# EAGLE board CT_schematic (EAGLE 7.6.0)

Size 100 x 80 mm. Coordinates in mm from the lower left corner, seen from the top.
Outline: 0,0 100,0 100,80 0,80 0,0
Copper layers (1*16): Top 0.035mm / dielectric 1.5mm / Bottom 0.035mm
Design rules "default": minimum track width 10mil, minimum drill 24mil, track to track 8mil, track to pad 8mil, pad to pad 8mil, via to via 8mil, smd to smd 8mil, copper to edge 40mil, drill to drill 8mil, minimum pad ring 10mil, minimum via ring 8mil, stop-mask expansion 4mil, vias tented up to drill 0mil, thermal gap 10mil

## Footprints (pad centres in the part's own frame; a part is rotated, then mirrored left to right if it is on the bottom)
C0603 = smd 0.8 x 0.8: 1 -0.762,0; 2 0.762,0
C0402 = smd 0.5 x 0.5: 1 -0.508,0; 2 0.508,0
C1210 = smd 1.2 x 2.5: 1 -1.524,0; 2 1.524,0
R0603 = smd 0.8 x 0.8: 1 -0.762,0; 2 0.762,0
EXV-9H = smd 3.505 x 1.676: 1 -2.857,0; 2 2.857,0
L0603 = smd 0.8 x 0.8: 1 -0.762,0; 2 0.762,0
IND25X25CZ = smd 2.489 x 3.429: 1 -2.718,0; 2 2.718,0
PJ-037B_PACKAGE = drill 3.7 square: 1 12,0 | drill 3.2 square: 2 6,0
WLCSP100 = smd 0.229 x 0.229: A1 -1.8,1.8; A2 -1.4,1.8; A3 -1,1.8; A4 -0.6,1.8; A5 -0.2,1.8; A6 0.2,1.8; A7 0.6,1.8; A8 1,1.8; A9 1.4,1.8; A10 1.8,1.8; B1 -1.8,1.4; B2 -1.4,1.4; B3 -1,1.4; B4 -0.6,1.4; B5 -0.2,1.4; B6 0.2,1.4; B7 0.6,1.4; B8 1,1.4; B9 1.4,1.4; B10 1.8,1.4; C1 -1.8,1; C2 -1.4,1; C3 -1,1; C4 -0.6,1; C5 -0.2,1; C6 0.2,1; C7 0.6,1; C8 1,1; C9 1.4,1; C10 1.8,1; D1 -1.8,0.6; D2 -1.4,0.6; D3 -1,0.6; D4 -0.6,0.6; D5 -0.2,0.6; D6 0.2,0.6; D7 0.6,0.6; D8 1,0.6; D9 1.4,0.6; D10 1.8,0.6; E1 -1.8,0.2; E2 -1.4,0.2; E3 -1,0.2; E4 -0.6,0.2; E5 -0.2,0.2; E6 0.2,0.2; E7 0.6,0.2; E8 1,0.2; E9 1.4,0.2; E10 1.8,0.2; F1 -1.8,-0.2; F2 -1.4,-0.2; F3 -1,-0.2; F4 -0.6,-0.2; F5 -0.2,-0.2; F6 0.2,-0.2; F7 0.6,-0.2; F8 1,-0.2; F9 1.4,-0.2; F10 1.8,-0.2; G1 -1.8,-0.6; G2 -1.4,-0.6; G3 -1,-0.6; G4 -0.6,-0.6; G5 -0.2,-0.6; G6 0.2,-0.6; G7 0.6,-0.6; G8 1,-0.6; G9 1.4,-0.6; G10 1.8,-0.6; H1 -1.8,-1; H2 -1.4,-1; H3 -1,-1; H4 -0.6,-1; H5 -0.2,-1; H6 0.2,-1; H7 0.6,-1; H8 1,-1; H9 1.4,-1; H10 1.8,-1; J1 -1.8,-1.4; J2 -1.4,-1.4; J3 -1,-1.4; J4 -0.6,-1.4; J5 -0.2,-1.4; J6 0.2,-1.4; J7 0.6,-1.4; J8 1,-1.4; J9 1.4,-1.4; J10 1.8,-1.4; K1 -1.8,-1.8; K2 -1.4,-1.8; K3 -1,-1.8; K4 -0.6,-1.8; K5 -0.2,-1.8; K6 0.2,-1.8; K7 0.6,-1.8; K8 1,-1.8; K9 1.4,-1.8; K10 1.8,-1.8
TST-110-05-T-D-RA = drill 1 pad 1.7 square: 1 0,0 | drill 1 pad 1.7: 2 0,2.54; 3 2.54,0; 4 2.54,2.54; 5 5.08,0; 6 5.08,2.54; 7 7.62,0; 8 7.62,2.54; 9 10.16,0; 10 10.16,2.54; 11 12.7,0; 12 12.7,2.54; 13 15.24,0; 14 15.24,2.54; 15 17.78,0; 16 17.78,2.54; 17 20.32,0; 18 20.32,2.54; 19 22.86,0; 20 22.86,2.54
TDFN-8/6MM = smd 0.3 x 0.75: 1 0,0; 2 0.5,0; 3 1,0; 4 1.5,0; 5 1.5,3; 6 1,3; 7 0.5,3; 8 0,3
FCI_10118193-0001LF = smd 0.4 x 1.35: 1 -1.3,2.675; 2 -0.65,2.675; 3 0,2.675; 4 0.65,2.675; 5 1.3,2.675 | smd 1.6 x 1.4: 6 -3.2,2.45; 7 3.2,2.45 | smd 1.9 x 1.9: 8 -1.2,0; 9 1.2,0 | hole 0.5: -3.3,0; 3.3,0
SOT143B = smd 1 x 0.7: 1 -0.75,-1 | smd 0.6 x 0.7: 2 0.95,-1; 3 0.95,1; 4 -0.95,1
ABS07-32.768KHZ-7-T = smd 1.1 x 2.4: 1 -2.5,0; 2 0,0
ASFL1 = smd 1.7 x 1.5: 1 -1.27,-1.1; 2 1.27,-1.1; 3 1.27,1.1; 4 -1.27,1.1
IR3899MTR1PBF = smd 0.25 x 0.75: 1 0,0; 2 0.5,0; 3 1,0; 4 1.5,0; 5 2,0; 6 2.5,0; 7 3,0 | smd 0.75 x 0.25: 8 3.425,0.78; 9 3.425,1.28; 10 3.425,1.78; 14 -0.425,1.78; 15 -0.425,1.28; 16 -0.425,0.78 | smd 0.3 x 1.95: 11 3.22,3.63 | smd 1.62 x 2.42: 12 1.786,3.8 | smd 1 x 1.95: 13 0.117,3.63 | smd 2.19 x 1.25: 17 1.51,1.26
SON-6 = smd 0.55 x 0.3: 1 -0.355,0.5 | smd 0.52 x 0.3: 2 -0.37,0; 3 -0.37,-0.5; 4 0.37,-0.5; 5 0.37,0; 6 0.37,0.5
SW_4-1437565-2 = smd 1.4 x 2.1: 1 -2.23,4.55; 2 -2.23,-4.55; 3 2.23,4.55; 4 2.23,-4.55
LGM67K-G1J2-24-Z = smd 0.8 x 1.4: A -2,0; C 0,0
NC7SZ125M5X = smd 1.3 x 0.7: 1 -1.3,0.95; 2 -1.3,0; 3 -1.3,-0.95; 4 1.3,-0.95; 5 1.3,0.95

## Placement (x,y rotation side)
C1  1e-06  [C0603]  -41.91,54.61 0 top  (outside the outline)
C2  1e-07  [C0603]  -45.72,54.61 0 top  (outside the outline)
C3  1e-07  [C0603]  -49.53,54.61 0 top  (outside the outline)
C4  1e-07  [C0603]  -53.34,54.61 0 top  (outside the outline)
C5  1e-07  [C0603]  -57.15,54.61 0 top  (outside the outline)
C6  1e-07  [C0603]  -60.96,54.61 0 top  (outside the outline)
C7  1e-07  [C0603]  -64.77,54.61 0 top  (outside the outline)
C8  1e-07  [C0603]  -15.24,59.69 0 top  (outside the outline)
C9  1e-07  [C0603]  -19.05,59.69 0 top  (outside the outline)
C10  4.7e-06  [C0603]  -34.29,54.61 0 top  (outside the outline)
C11  1e-08  [C0603]  -22.86,59.69 0 top  (outside the outline)
C12  1e-06  [C0603]  -26.67,59.69 0 top  (outside the outline)
C13  1e-11  [C0402]  -64.77,59.69 0 top  (outside the outline)
C14  1e-11  [C0402]  -15.24,64.77 0 top  (outside the outline)
C15  1e-07  [C0402]  -19.05,64.77 0 top  (outside the outline)
C16  1e-07  [C0402]  -22.86,64.77 0 top  (outside the outline)
C17  1e-08  [C0402]  -26.67,64.77 0 top  (outside the outline)
C18  1e-08  [C0402]  -30.48,64.77 0 top  (outside the outline)
C19  0.0001  [C1210]  -16.51,44.45 0 top  (outside the outline)
C20  2.2e-06  [C0603]  -38.1,54.61 0 top  (outside the outline)
C21  1e-07  [C0402]  -34.29,64.77 0 top  (outside the outline)
C22  1e-07  [C0402]  -38.1,64.77 0 top  (outside the outline)
C23  8.8006443804346e-09  [R0603]  -39.37,43.18 0 top  (outside the outline)
C24  3.0002196751482e-07  [R0603]  -49.53,43.18 0 top  (outside the outline)
C27  1e-07  [C0402]  -41.91,64.77 0 top  (outside the outline)
C28  0.0001  [EXV-9H]  -54.61,29.21 0 top  (outside the outline)
C29  0.0001  [EXV-9H]  -17.78,36.83 0 top  (outside the outline)
C30  1e-08  [C0402]  -45.72,64.77 0 top  (outside the outline)
C31  1e-08  [C0402]  -49.53,64.77 0 top  (outside the outline)
F1  240.0  [L0603]  -30.48,59.69 0 top  (outside the outline)
I1  6.8e-07  [IND25X25CZ]  -27.94,36.83 0 top  (outside the outline)
J1  PJ-037B  [PJ-037B_PACKAGE]  -27.94,7.62 0 top  (outside the outline)
R2  1000.0  [R0603]  -34.29,59.69 0 top  (outside the outline)
R4  4700.0  [R0603]  -38.1,59.69 0 top  (outside the outline)
R5  2200.0  [R0603]  -41.91,59.69 0 top  (outside the outline)
R6  2200.0  [R0603]  -45.72,59.69 0 top  (outside the outline)
R7  10000.0  [R0603]  -34.29,49.53 0 top  (outside the outline)
R8  10000.0  [R0603]  -39.37,49.53 0 top  (outside the outline)
R9  10000.0  [R0603]  -44.45,49.53 0 top  (outside the outline)
R10  10000.0  [R0603]  -49.53,49.53 0 top  (outside the outline)
R11  10000.0  [R0603]  -54.61,49.53 0 top  (outside the outline)
R12  10000.0  [R0603]  -59.69,49.53 0 top  (outside the outline)
R13  10000.0  [R0603]  -64.77,49.53 0 top  (outside the outline)
R14  0.1  [R0603]  -49.53,59.69 0 top  (outside the outline)
R15  4030.2416170974  [R0603]  -57.15,43.18 0 top  (outside the outline)
R16  719.68600305311  [R0603]  -64.77,43.18 0 top  (outside the outline)
R17  57.923764705882  [R0603]  -19.05,49.53 0 top  (outside the outline)
R18  130.0  [R0603]  -53.34,59.69 0 top  (outside the outline)
R19  39000.0  [R0603]  -15.24,54.61 0 top  (outside the outline)
R20  49900.0  [R0603]  -20.32,54.61 0 top  (outside the outline)
R21  5100.0  [R0603]  -57.15,59.69 0 top  (outside the outline)
R22  10000.0  [R0603]  -25.4,54.61 0 top  (outside the outline)
R23  10000.0  [R0603]  -30.48,54.61 0 top  (outside the outline)
R24  9100.0  [R0603]  -60.96,59.69 0 top  (outside the outline)
R25  680000.0  [R0603]  -24.13,49.53 0 top  (outside the outline)
R26  120000.0  [R0603]  -29.21,49.53 0 top  (outside the outline)
U1  STM32F303VEY6TR  [WLCSP100]  -58.42,17.78 0 top  (outside the outline)
U2  TST-110-05-T-D-RA  [TST-110-05-T-D-RA]  -46.99,26.67 0 top  (outside the outline)
U3  24AA08T-I/MNY  [TDFN-8/6MM]  -24.13,19.05 0 top  (outside the outline)
U4  10118193-0001LF  [FCI_10118193-0001LF]  -49.53,17.78 0 top  (outside the outline)
U5  prtr5v0u2ax  [SOT143B]  -62.23,64.77 0 top  (outside the outline)
U6  ABS07-32.768KHZ-7-T  [ABS07-32.768KHZ-7-T]  -46.99,36.83 0 top  (outside the outline)
U7  ASFL1-25MHZ-NCS  [ASFL1]  -40.64,19.05 0 top  (outside the outline)
U8  IR3899MTR1PBF  [IR3899MTR1PBF]  -60.96,3.81 0 top  (outside the outline)
U9  TPS3895ADRYR  [SON-6]  -13.97,68.58 0 top  (outside the outline)
U10  4-1437565-2  [SW_4-1437565-2]  -44.45,6.35 0 top  (outside the outline)
U11  Q65110A2395  [LGM67K-G1J2-24-Z]  -55.88,36.83 0 top  (outside the outline)
U12  nc7sz125m5x  [NC7SZ125M5X]  -21.59,43.18 0 top  (outside the outline)
U13  nc7sz125m5x  [NC7SZ125M5X]  -27.94,43.18 0 top  (outside the outline)

## Library data of the parts
C1-C24 C27-C31 F1 I1 J1 R2 R4-R26 U1-U13 = circuit_tree

## Nets
CLK_CRYSTAL_U1_C10: C13.1 U1.C10 U6.1
CLK_CRYSTAL_U1_D9: C14.1 U1.D9 U6.2
CLK_U1_F10: U1.F10 U7.3
GND: C1.2 C2.2 C3.2 C4.2 C5.2 C6.2 C7.2 C8.2 C9.2 C10.2 C11.2 C12.2 C13.2 C14.2 C15.2 C16.2 C17.2 C18.2 C20.2 C21.2 C22.2 C27.2 C28.2 C29.2 C30.2 C31.2 J1.2 R2.2 R7.2 R13.2 R14.1 R14.2 R16.2 R19.2 R21.2 R24.2 R26.2 U1.A1 U1.A2 U1.B1 U1.C7 U1.H8 U1.J1 U1.K1 U1.K2 U1.K9 U1.K10 U2.4 U2.6 U2.8 U2.10 U2.12 U2.14 U2.16 U2.18 U2.20 U3.4 U4.5 U4.6 U4.7 U4.8 U4.9 U5.1 U7.2 U8.4 U8.11 U8.17 U9.2 U11.C U12.2 U12.3 U13.1 U13.3
NET_U1_A7: R7.1 U1.A7
NET_U1_B6: R5.1 U1.B6 U3.6
NET_U1_C5: R6.1 U1.C5 U3.5
NET_U1_E9: R4.1 U1.E9 U13.4
NET_U1_J10: C11.1 C12.1 F1.1 U1.J8 U1.J10
NET_U1_K6: U11.A
NET_U1_K7: U10.3 U10.4
NET_U2_19: R13.1 U2.19
NET_U5_4: U4.1 U5.4
NET_U8_1: C23.1 R15.1 R16.1 R17.1 R18.1 U8.1 U8.8
NET_U8_2: C22.1 U8.2
NET_U8_3: C23.2 C24.1 C24.2 U8.3
NET_U8_5: R19.1 U8.5
NET_U8_10: C20.1 U8.10
NET_U8_12: C19.1 I1.1 U8.12
NET_U8_13: U8.13
NET_U8_14: C19.2 U8.14
NET_U8_15: R20.1 R21.1 U8.15
NET_U8_ATNET_3: I1.2 R15.2
NET_U8_ATNET_4: C24.2 R17.2
NET_U8_ATNET_5: R18.2
NET_U9_1: R23.1 R24.1 U9.1
NET_U9_3: R25.2 R26.1 U9.3
NET_U9_4: R22.1 U9.4 U12.4 U13.2
NET_U10_1: R2.1 U10.1 U10.2
PROC_SYS_JTCK_SWCLK: R11.1 U1.C2 U2.9
PROC_SYS_JTDI: R9.1 U1.B2 U2.5
PROC_SYS_JTDO_TRACESWO: U1.A5 U2.13
PROC_SYS_JTMS_SWDIO: R10.1 U1.E3 U2.7
PROC_SYS_NJTRST: R8.1 U1.B5 U2.3
PROC_USB_DM: U1.E2 U4.2 U5.3
PROC_USB_DP: U1.D1 U4.3 U5.2
RST_OUT_U2_SRESET_B: R12.1 U2.15 U12.1
VCC_S1_17V0: C21.1 C28.1 C29.1 J1.1 R20.2 U8.9
VCC_TIER1_3V3: C1.1 C2.1 C3.1 C4.1 C5.1 C6.1 C7.1 C8.1 C9.1 C10.1 C15.1 C16.1 C17.1 C18.1 C27.1 C30.1 C31.1 F1.2 I1.2 R4.2 R5.2 R6.2 R8.2 R9.2 R10.2 R11.2 R12.2 R15.2 R22.2 R23.2 R25.1 U1.A9 U1.A10 U1.B8 U1.B10 U1.D2 U1.D8 U1.J5 U1.K8 U2.1 U2.2 U3.7 U3.8 U7.4 U9.6 U12.5 U13.5

## Tracks (layer width: path | path; a pad name or v marks a point on that pad's centre or on a via)
CLK_CRYSTAL_U1_C10  (2 unrouted)
CLK_CRYSTAL_U1_D9  (2 unrouted)
CLK_U1_F10  (1 unrouted)
GND  (72 unrouted)
NET_U1_A7  (1 unrouted)
NET_U1_B6  (2 unrouted)
NET_U1_C5  (2 unrouted)
NET_U1_E9  (2 unrouted)
NET_U1_J10  (4 unrouted)
NET_U1_K7  (1 unrouted)
NET_U2_19  (1 unrouted)
NET_U5_4  (1 unrouted)
NET_U8_1  (6 unrouted)
NET_U8_2  (1 unrouted)
NET_U8_3  (3 unrouted)
NET_U8_5  (1 unrouted)
NET_U8_10  (1 unrouted)
NET_U8_12  (2 unrouted)
NET_U8_14  (1 unrouted)
NET_U8_15  (2 unrouted)
NET_U8_ATNET_3  (1 unrouted)
NET_U8_ATNET_4  (1 unrouted)
NET_U9_1  (2 unrouted)
NET_U9_3  (2 unrouted)
NET_U9_4  (3 unrouted)
NET_U10_1  (2 unrouted)
PROC_SYS_JTCK_SWCLK  (2 unrouted)
PROC_SYS_JTDI  (2 unrouted)
PROC_SYS_JTDO_TRACESWO  (1 unrouted)
PROC_SYS_JTMS_SWDIO  (2 unrouted)
PROC_SYS_NJTRST  (2 unrouted)
PROC_USB_DM  (2 unrouted)
PROC_USB_DP  (2 unrouted)
RST_OUT_U2_SRESET_B  (2 unrouted)
VCC_S1_17V0  (5 unrouted)
VCC_TIER1_3V3  (46 unrouted)